# EAGLE board v3b (EAGLE 6.5.0)
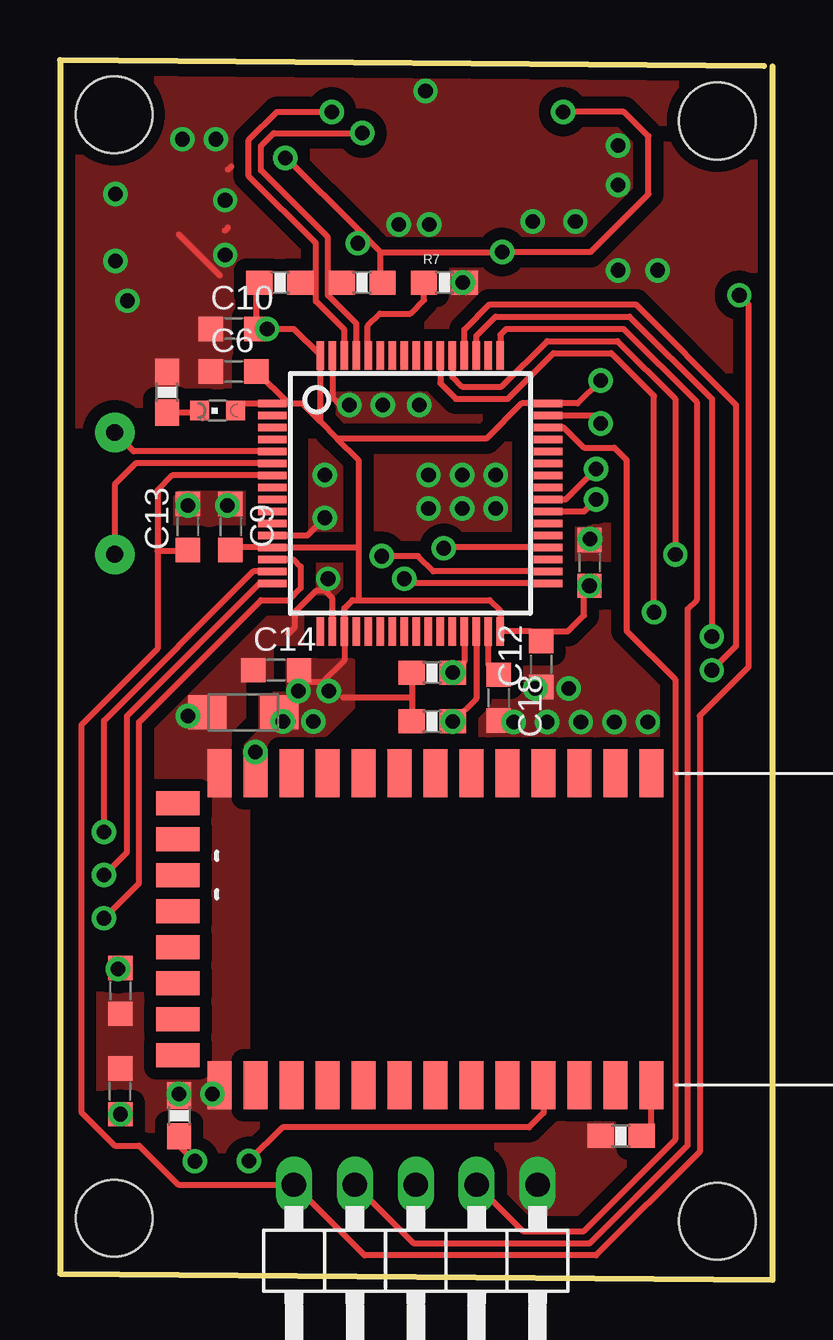
[diagram p0: board, top side]
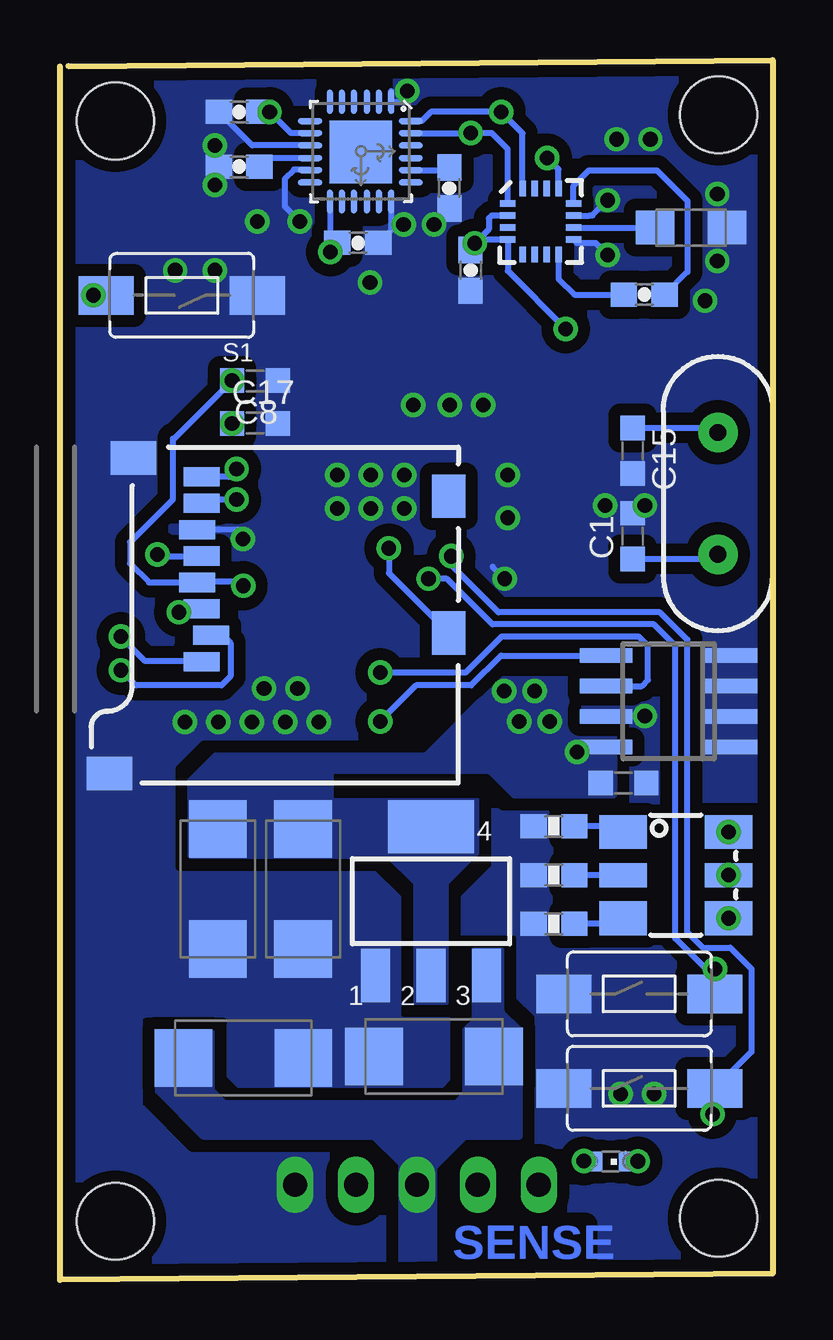
[diagram p1: board, bottom side, seen from below]

Size 29.72 x 50.83 mm. Coordinates in mm from the lower left corner, seen from the top.
Outline: 29.36,50.57 0,50.83 0,0.25 29.72,0 29.72,50.55
Copper layers (1*16): Top 0.035mm / dielectric 1.5mm / Bottom 0.035mm
Design rules "default *": minimum track width 10mil, minimum drill 24mil, track to track 8mil, track to pad 8mil, pad to pad 8mil, via to via 10mil, smd to smd 8mil, copper to edge 20mil, drill to drill 10mil, minimum pad ring 10mil, minimum via ring 8mil, stop-mask expansion 0mil, vias tented up to drill 100mil, thermal gap 10mil
Net classes: 1 power: width 0.15 mm, drill 0.2 mm, clearance 0.152 mm
Holes 3.2 mm at 27.41,48.29 2.26,48.54 27.41,2.44 2.26,2.57
tKeepout: area -11.1,-0.5 to -4.1,6.5

## Footprints (pad centres in the part's own frame; a part is rotated, then mirrored left to right if it is on the bottom)
C-0603 = smd 1.016 x 1.016: 1 -0.953,0; 2 0.953,0
SMC_C = smd 2.4 x 2.4: + -2.5,0; - 2.5,0
SMC_A = smd 1.6 x 1.4: + -1.5,0; - 1.5,0
SPARKFUN_0603-CAP = smd 1.1 x 1: 1 -0.85,0; 2 0.85,0
SO-08 = smd 0.6 x 2.2: 1 -1.905,-2.6; 2 -0.635,-2.6; 3 0.635,-2.6; 4 1.905,-2.6; 5 1.905,2.6; 6 0.635,2.6; 7 -0.635,2.6; 8 -1.905,2.6
LINEAR_SOT223 = smd 1.219 x 2.235: 1 -2.311,-3.099; 2 0,-3.099; 3 2.311,-3.099 | smd 3.6 x 2.2: 4 0,3.099
TESTING_QFN-24-4MM2 = smd 1.016 x 0.254: 1 -2.066,1.257; 2 -2.066,0.75; 3 -2.066,0.247; 4 -2.066,-0.287; 5 -2.066,-0.792; 6 -2.066,-1.297; 13 2.086,-1.297; 14 2.086,-0.792; 15 2.086,-0.287; 16 2.086,0.247; 17 2.086,0.75; 18 2.086,1.257 | smd 0.254 x 1.016: 7 -1.267,-2.122; 8 -0.762,-2.122; 9 -0.258,-2.122; 10 0.278,-2.122; 11 0.78,-2.122; 12 1.287,-2.122; 19 1.287,2.082; 20 0.78,2.082; 21 0.278,2.082; 22 -0.258,2.082; 23 -0.762,2.082; 24 -1.267,2.082 | smd 2.616 x 2.616: P$1 0.02,-0.01
SPARKFUN_16LPCC = smd 0.65 x 0.28: 1 -1.37,0.75; 2 -1.37,0.25; 3 -1.37,-0.25; 4 -1.37,-0.75; 9 1.37,-0.75; 10 1.37,-0.25; 11 1.37,0.25; 12 1.37,0.75 | smd 0.28 x 0.65: 5 -0.75,-1.37; 6 -0.25,-1.37; 7 0.25,-1.37; 8 0.75,-1.37; 13 0.75,1.37; 14 0.25,1.37; 15 -0.25,1.37; 16 -0.75,1.37
1X05/90 = drill 1.016 long: 1 -5.08,-3.81; 2 -2.54,-3.81; 3 0,-3.81; 4 2.54,-3.81; 5 5.08,-3.81
CHIPLED_0603 = smd 0.8 x 0.8: A 0,-0.75; C 0,0.75
SPARKFUN_0603-RES = smd 1.1 x 1: 1 -0.85,0; 2 0.85,0
TACTILE-SWITCH-1101NE = smd 2.3 x 1.6: P$1 -3.15,0; P$2 3.15,0
MICRO-SD-SOCKET-PP = smd 0.8 x 1.5: 1 -8.94,10.7; 2 -7.84,10.3; 3 -6.74,10.7; 4 -5.64,10.9; 5 -4.54,10.7; 6 -3.44,10.9; 7 -2.34,10.7; 8 -1.24,10.7 | smd 1.8 x 1.4: CD1 -2.05,0.4; CD2 -7.75,0.4 | smd 1.4 x 1.9: GND1 -13.6,14.55; GND3 -0.45,13.55
BLUETOOTH_SMD = smd 2 x 1: 1 0,0; 2 0,-1.5; 3 0,-3; 4 0,-4.5; 5 0,-6; 6 0,-7.5; 7 0,-9; 8 0,-10.5; 9 0,-12; 10 0,-13.5; 11 0,-15; 12 0,-16.5; 13 0,-18; 22 13,-18; 23 13,-16.5; 24 13,-15; 25 13,-13.5; 26 13,-12; 27 13,-10.5; 28 13,-9; 29 13,-7.5; 30 13,-6; 31 13,-4.5; 32 13,-3; 33 13,-1.5; 34 13,0 | smd 1 x 1.8: 14 1.25,-19.75; 15 2.75,-19.75; 16 4.25,-19.75; 17 5.75,-19.75; 18 7.25,-19.75; 19 8.75,-19.75; 20 10.25,-19.75; 21 11.75,-19.75
LQFP64 = smd 0.3 x 1.2: 1 -3.75,-5.75; 2 -3.25,-5.75; 3 -2.75,-5.75; 4 -2.25,-5.75; 5 -1.75,-5.75; 6 -1.25,-5.75; 7 -0.75,-5.75; 8 -0.25,-5.75; 9 0.25,-5.75; 10 0.75,-5.75; 11 1.25,-5.75; 12 1.75,-5.75; 13 2.25,-5.75; 14 2.75,-5.75; 15 3.25,-5.75; 16 3.75,-5.75; 33 3.75,5.75; 34 3.25,5.75; 35 2.75,5.75; 36 2.25,5.75; 37 1.75,5.75; 38 1.25,5.75; 39 0.75,5.75; 40 0.25,5.75; 41 -0.25,5.75; 42 -0.75,5.75; 43 -1.25,5.75; 44 -1.75,5.75; 45 -2.25,5.75; 46 -2.75,5.75; 47 -3.25,5.75; 48 -3.75,5.75 | smd 1.2 x 0.3: 17 5.75,-3.75; 18 5.75,-3.25; 19 5.75,-2.75; 20 5.75,-2.25; 21 5.75,-1.75; 22 5.75,-1.25; 23 5.75,-0.75; 24 5.75,-0.25; 25 5.75,0.25; 26 5.75,0.75; 27 5.75,1.25; 28 5.75,1.75; 29 5.75,2.25; 30 5.75,2.75; 31 5.75,3.25; 32 5.75,3.75; 49 -5.75,3.75; 50 -5.75,3.25; 51 -5.75,2.75; 52 -5.75,2.25; 53 -5.75,1.75; 54 -5.75,1.25; 55 -5.75,0.75; 56 -5.75,0.25; 57 -5.75,-0.25; 58 -5.75,-0.75; 59 -5.75,-1.25; 60 -5.75,-1.75; 61 -5.75,-2.25; 62 -5.75,-2.75; 63 -5.75,-3.25; 64 -5.75,-3.75
SMD = smd 1.99 x 1.4: B+ -2.2,-1.8; B- 2.2,-1.8; R+ -2.2,1.8; R- 2.2,1.8 | smd 1.99 x 1: G+ -2.2,0; G- 2.2,0
HC49US = drill 0.7 pad 1.651: 1 -2.54,0; 2 2.54,0

## Placement (x,y rotation side)
C1  [C-0603]  5.84,30.99 90 bottom
C2  [C-0603]  22.07,29.87 270 top
C3  6v 10u  [SMC_C]  19.58,16.28 270 bottom
C4  6v 10u  [SMC_A]  7.65,23.65 180 top
C5  16v47u  [SMC_C]  14.12,9.3 180 bottom
C6  [C-0603]  7.24,37.85 0 top
C7  [C-0603]  2.51,7.85 90 top
C8  [C-0603]  21.59,37.47 180 bottom
C9  [C-0603]  7.11,31.37 270 top
C10  [C-0603]  7.24,39.62 0 top
C11  [C-0603]  6.22,20.7 180 bottom
C12  [C-0603]  20.07,25.65 90 top
C13  [C-0603]  5.33,31.37 90 top
C14  [C-0603]  9.02,25.4 0 top
C15  [C-0603]  5.84,34.54 270 bottom
C16  16v47u  [SMC_C]  22.07,9.25 0 bottom
C17  [C-0603]  21.59,35.69 0 bottom
C18  [C-0603]  18.29,24.26 270 top
C23  6v 10u  [SMC_C]  23.14,16.28 270 bottom
C25  [C-0603]  2.51,12.04 270 top
C26  100n  [SPARKFUN_0603-CAP]  22.25,46.38 180 bottom
C27  100n  [SPARKFUN_0603-CAP]  5.36,41.05 0 bottom
C28  4.7u  [SMC_A]  3.4,43.84 0 bottom
C29  100n  [SPARKFUN_0603-CAP]  12.6,42.06 270 bottom
C36  2.2n  [SPARKFUN_0603-CAP]  13.49,45.49 270 bottom
C38  100n  [SPARKFUN_0603-CAP]  17.3,43.21 0 bottom
C39  100n  [SPARKFUN_0603-CAP]  22.25,48.67 180 bottom
IC2  24LC256SN  [SO-08]  4.34,24.1 90 bottom
IC3  LINEAR_MC33269ST-3.3T3  [LINEAR_SOT223]  14.25,15.77 0 bottom
IC4  MPU-6050  [TESTING_QFN-24-4MM2]  17.17,47.02 270 bottom
IC5  HMC5883L  [SPARKFUN_16LPCC]  9.68,44.09 0 bottom
JP4  [1X05/90]  14.83,0.15 180 top
LD1  [CHIPLED_0603]  6.76,4.93 270 bottom
LD2  [CHIPLED_0603]  6.58,36.22 90 top
R1  10K  [SPARKFUN_0603-RES]  4.47,36.98 90 top
R2  10K  [SPARKFUN_0603-RES]  9.12,14.83 180 bottom
R3  10K  [SPARKFUN_0603-RES]  9.12,16.87 180 bottom
R5  10K  [SPARKFUN_0603-RES]  23.39,5.99 180 top
R6  10K  [SPARKFUN_0603-RES]  9.12,18.9 180 bottom
R7  10k  [SPARKFUN_0603-RES]  16.03,41.55 0 top
R9  10K  [SPARKFUN_0603-RES]  4.98,6.83 90 top
R10  [SPARKFUN_0603-RES]  12.6,41.55 0 top
R11  [SPARKFUN_0603-RES]  9.17,41.55 180 top
R15  4K7  [SPARKFUN_0603-RES]  15.52,25.3 0 top
R16  4K7  [SPARKFUN_0603-RES]  15.52,23.27 180 top
S1  RESET  [TACTILE-SWITCH-1101NE]  24.64,41.02 180 bottom
S2  RESET  [TACTILE-SWITCH-1101NE]  5.56,11.91 0 bottom
S4  RESET  [TACTILE-SWITCH-1101NE]  5.56,7.98 0 bottom
SDCARD2  microSD Socket  [MICRO-SD-SOCKET-PP]  13.11,34.7 90 bottom
U1  HC_05  [BLUETOOTH_SMD]  24.66,21.11 270 top
U2  STM32F405RGT  [LQFP64]  14.6,32.77 270 top
U$12  RGB_LED  [SMD]  4.04,16.87 0 bottom
Y2  [HC49US]  2.29,32.77 90 bottom

## Library data of the parts
C1 C2 C6-C15 C17 C18 C25 = cap-pan40
C3-C5 C16 C23 C28 = rcl
C26 C27 C29 C36 C38 C39 R10 R11 = Helios_RLC
IC2 = microchip; DIGIKEY: 24LC256-E/SN-ND; MF: MICROCHIP; MPN: 24LC256-I/SN; OC_FARNELL: 9757996; OC_NEWARK: 27C9144
IC3 = Robotech_Other
IC4 IC5 = Helios_IMU
JP4 = pinhead-1
LD1 LD2 = led
R1-R3 R5-R7 R9 R15 R16 = Robotech_RCL
S1 S2 S4 = pixhawk2; PARTNO: EVQ-P7J01P
SDCARD2 = SparkFun
U1 = SerialPortBluetooth
U2 = m4quad
U$12 = RGB_LED
Y2 = SparkFun-FreqCtrl

## Nets
3.3V: C2.2 C3.+ C4.+ C6.2 C8.2 C9.2 C10.2 C11.2 C12.2 C14.2 C23.+ C29.1 C38.1 C39.1 IC2.8 IC3.2 IC3.4 IC4.8 IC4.13 IC5.2 IC5.4 IC5.13 LD2.A R10.2 R11.2 R15.1 R16.2 SDCARD2.4 U1.12 U2.1 U2.13 U2.19 U2.32 U2.48 U2.64
+5V: C5.+ C16.+ IC3.3 JP4.3
BOOT0: R7.1 U2.60
BOOT1: U2.28
BT_KEY: R5.1 U1.34
BUTTONA: C25.1 S2.P$2 U2.33
BUTTONB: C7.1 S4.P$2 U2.34
GND: C1.2 C2.1 C3.- C4.- C5.- C6.1 C7.2 C8.1 C9.1 C10.1 C11.1 C12.1 C13.2 C14.1 C15.2 C16.- C17.2 C18.2 C23.- C25.2 C26.2 C28.- C29.2 C36.2 C38.2 C39.2 IC2.1 IC2.2 IC2.3 IC2.4 IC2.7 IC3.1 IC4.1 IC4.9 IC4.11 IC4.18 IC5.9 IC5.11 JP4.1 R1.2 R2.2 R3.2 R5.2 R6.2 R7.2 R9.2 S1.P$1 S2.P$1 S4.P$1 SDCARD2.6 SDCARD2.GND1 SDCARD2.GND3 U1.13 U1.22 U2.12 U2.18 U2.63
I2C1_SCL: IC4.23 IC5.1 R10.1 U2.61
I2C1_SDA: IC4.24 IC5.16 R11.1 U2.62
I2C2_SCL: IC2.6 R15.2 U2.29
I2C2_SDA: IC2.5 R16.1 U2.30
MISO: U2.22
MOSI: U2.23
N$2: R2.1 U$12.B+
N$3: C26.1 IC4.10
N$4: LD1.A U1.31
N$5: LD1.C R9.1
N$6: R6.1 U$12.R+
N$7: R3.1 U$12.G+
N$8: C36.1 IC4.20
N$10: C27.1 IC5.8
N$11: LD2.C R1.1
N$12: C28.+ IC5.10
N$13: C27.2 IC5.12
N$14: C15.1 U2.5 Y2.2
N$15: C1.1 U2.6 Y2.1
N$18: C18.1 U2.31
N$19: C17.1 U2.47
NSS: U2.20
RGB_CH1: U2.14 U$12.B-
RGB_CH2: U2.15 U$12.R-
RGB_CH3: U2.16 U$12.G-
SCK: U2.21
SDIO_CLK: SDCARD2.5 U2.53
SDIO_CMD: SDCARD2.3 U2.54
SDIO_D0: SDCARD2.7 U2.39
SDIO_D1: SDCARD2.8 U2.40
SDIO_D2: SDCARD2.1 U2.51
SDIO_D3: SDCARD2.2 U2.52
SDIO_DETECT: SDCARD2.CD2 U2.36
SW-!RESET: C13.1 JP4.5 S1.P$2 U2.7
SW_CLK: JP4.4 U2.49
SW_DIO: JP4.2 U2.46
UART_RXD: U2.42
USART1_RX: U2.59
USART1_TX: U2.58
USART3_RX: U1.1
USART3_TX: U1.2

## Tracks (layer width: path | path; a pad name or v marks a point on that pad's centre or on a via)
3.3V  (via drill 0.61)
  Top 0.254: v20.98,48.67 23.52,48.67 24.54,47.65 24.54,45.24 22.12,42.82 v18.44,42.82 13.36,42.82 | 13.36,42.82 13.36,41.64 R10.2 13.49,41.59 | v12.42,43.19 12.42,43.77 | 13.36,42.82 12.42,43.77 | C12.2 19.66,27.02 | 19.66,27.02 U2.32 18.35,27.87 17.91,28.32 12.45,28.32 | 9.65,24.89 10.92,24.89 11.85,25.83 U2.19 11.85,27.98 12.19,28.32 12.45,28.32 | R15.1 14.67,24.26 | 14.67,24.26 R16.2 | 14.67,24.26 11.81,24.26 | 19.66,27.02 21.17,27.02 21.84,27.69 21.84,28.69 | 21.84,28.69 21.84,28.82 | 9.52,36.52 U2.1 7.62,36.52 LD2.A | 11.56,35.05 12.45,34.16 12.45,30.61 | 11.56,35.05 10.85,35.75 | 10.85,35.75 U2.64 9.75,39.62 v8.64,39.62 C10.2 8.19,41.43 R11.2 | 10.85,35.75 10.09,36.52 9.52,36.52 | C6.2 9.52,36.52 | C8.2 21.59,36.52 U2.48 19.24,36.52 17.78,35.05 11.56,35.05 | 12.45,30.61 12.45,28.32 | 12.45,30.61 12.35,30.52 U2.13 7.21,30.52 C9.2 | v9.4,46.74 9.45,46.74 12.42,43.77 | U1.12 v8.15,22 | C2.2 21.84,28.69
  Bottom 0.254: C39.1 v20.98,48.67 20.09,47.78 IC4.8 | 24.03,29.08 24.03,29.11 24.01,29.11 | 12.22,43.34 IC5.4 11.05,42.03 v8.64,39.62 | 12.22,43.34 12.26,43.34 v12.42,43.19 11.84,43.77 11.84,44.22 11.71,44.34 IC5.2 | IC4.13 18.47,43.52 C38.1 17.93,43.42 17.93,43.46 18.44,42.95 v18.44,42.82 | C29.1 12.22,43.29 12.22,43.34 | 24.01,29.11 SDCARD2.4 26.01,29.06 26.8,29.84 26.8,30.73 25.02,32.51 25.02,34.99 | 20.09,18.78 C3.+ | 25.02,35.06 25.02,34.99 | C8.2 25.02,34.99 | IC5.13 8.93,46.27 v9.4,46.74 | 24.01,29.11 22.26,29.11 C2.2
  other vias: 22.54,37.47 9.3,23.27 9.93,24.54 11.2,24.54 10.57,23.27 22.07,28.92
  pour Bottom (isolate 0.508, no thermals): 24.28,17.68 16.03,17.68 14.88,16.54 14.88,11.58 13.61,11.58 13.61,16.54 12.34,17.81 12.34,19.96 18.41,19.94 18.41,21.21 11.81,21.21 10.79,20.19 6.6,20.19 6.6,25.02 11.3,25.02 14.48,21.84 23.24,21.84 24.28,20.8
  pour Top (isolate 0.508, no thermals): 9.14,22.73 11.05,22.73 12.19,23.88 12.19,25.78 9.53,25.78 9.53,24.38 8.38,24.38 8.38,22.86 7.77,22.25 7.77,22.12 8.53,22.12
+5V
  pour Bottom (no thermals): 25.65,10.29 25.65,7.87 23.75,5.97 16.64,5.97 15.49,4.83 15.49,0.38 14.1,0.38 14.1,4.7 12.83,5.97 10.54,5.97 10.54,10.41 11.3,11.18 11.3,13.72 12.45,13.72 12.45,10.8 12.83,10.41 12.83,7.75 13.21,7.37 22.86,7.37 23.37,7.87 23.37,10.29
BOOT0
  Top 0.254: 15.14,41.52 R7.1 15.18,40.83 14.6,40.26 13.33,40.26 12.83,39.75 12.83,38.48 U2.60
BT_KEY
  Top 0.254: R5.1 24.66,6.41 U1.34
BUTTONA  (via drill 0.61)
  Top 0.254: U2.33 14.54,29.02 v14.35,29.21 | C25.1 2.48,12.95 v2.41,12.95
  Bottom 0.254: v14.35,29.21 13.59,29.21 11.68,27.31 4.95,27.31 4.06,26.42 4.06,14.22 2.79,12.95 v2.41,12.95 S2.P$2 | S2.P$2
BUTTONB  (via drill 0.61)
  Top 0.254: U2.34 15.57,29.52 14.93,30.15 v13.41,30.15 | C7.1 2.48,6.86 2.29,6.86
  Bottom 0.254: 2.44,8 S4.P$2 | S4.P$2 0.89,9.5 0.89,12.95 1.78,13.84 2.92,13.84 3.56,14.48 3.56,26.67 4.7,27.81 11.43,27.81 13.41,29.79 v13.41,30.15 | C7.1 2.51,7.87 S4.P$2
  other vias: 2.51,6.9
GND  (via drill 0.61)
  Top 0.254: 7.01,43.84 6.88,43.71 | 7.01,46.25 7.14,46.38 | U2.63 11.35,36.78 11.68,36.45 v12.06,36.45 | 22.1,31.1 v22.1,30.86 | U2.18 11.35,28.4 11.05,28.7 | 11.05,28.7 10.67,28.7 9.78,27.81 9.78,27.18 9.53,26.92 | 11.05,29.11 11.05,28.7 | 6.66,41.85 4.95,43.56 | U2.12 10.31,31.02 v11.05,31.75
  Bottom 0.254: 23.01,48.58 C39.2 21.71,47.27 IC4.9 | IC5.11 7.65,44.34 7.64,44.35 7.52,44.35 v6.88,44.98 | 15.91,49.54 IC4.1 15.49,49.08 15.49,49.3 15.23,49.55 15.14,49.55 | IC5.9 8.17,43.2 7.39,43.2 v6.88,42.7 | IC4.11 19.31,46.24 19.33,46.25 19.96,46.25 20.34,45.87 20.34,44.73 v19.71,44.09 | IC4.18 15.91,43.74 C38.2 | v11.18,29.21 11.68,29.72 | 22.11,31.26 SDCARD2.6 | IC2.7 6.92,23.5 v5.33,23.5
  other vias: 23.27,47.27 23.27,45.62 16.79,41.55 21.49,44.09 14.12,43.97 15.39,43.97 6.99,32.26 2.31,42.44 5.33,32.26 13.46,36.45 14.99,36.45 24.51,23.24 23.11,23.24 21.72,23.24 20.32,23.24 18.92,23.24 21.21,24.64 19.81,24.64 18.16,32.13 16.76,32.13 15.37,32.13 18.16,33.53 16.76,33.53 15.37,33.53 11.05,33.53 2.31,45.24 2.82,40.79 5.11,47.52 6.5,47.52 6.35,7.75 4.95,7.75 23.27,42.06 24.92,42.06 15.24,49.53
  pour Top (isolate 0.508, rank 6, no thermals): -2.64,51.71 -2.64,0.25 -2.39,0 35.69,0 35.94,0.25 35.94,9.27 8,9.27 7.75,9.53 7.75,19.69 8,19.94 35.69,19.94 35.94,20.19 35.94,52.07 -2.41,52.07 -2.67,51.82 -2.67,51.56
  pour Bottom (isolate 0.508, rank 6, no thermals): -5.69,50.7 29.62,50.7 29.62,-4.83 29.36,-5.08 -5.71,-5.08
I2C1_SCL  (via drill 0.61)
  Top 0.254: U2.61 12.35,39.84 11.18,41.02 11.18,41.53 | 11.18,41.53 11.18,43.43 8.38,46.23 8.38,47.24 8.92,47.78 v12.6,47.78 | R10.1 11.72,41.53 11.18,41.53
  Bottom 0.254: IC4.23 v12.6,47.78 11.71,47.78 11.05,47.12 IC5.1
I2C1_SDA  (via drill 0.61)
  Top 0.254: U2.62 11.85,39.58 10.67,40.77 10.67,41.53 | 10.03,41.54 R11.1 10.04,41.53 10.67,41.53 | 10.67,41.53 10.67,43.18 7.87,45.97 7.87,47.5 9.04,48.67 v11.33,48.67
  Bottom 0.254: v11.33,48.67 11.32,48.67 | IC4.24 14.63,48.28 14.25,48.67 v11.33,48.67 | IC5.16 10.43,47.77 v11.33,48.67
I2C2_SCL  (via drill 0.61)
  Top 0.254: U2.29 16.85,25.75 16.41,25.3 R15.2
  Bottom 0.254: R15.2 12.8,25.3 11.3,26.8 5.59,26.8 5.21,26.42 5.21,24.99 5.46,24.74 IC2.6
  other vias: 16.37,25.3
I2C2_SDA  (via drill 0.61)
  Top 0.254: U2.30 17.35,24.21 16.41,23.27 R16.1
  Bottom 0.254: IC2.5 11.33,26.01 12.57,24.77 14.87,24.77 R16.1
  other vias: 16.37,23.27
N$2
  Bottom 0.254: U$12.B+ 6.47,14.83 R2.1
N$3
  Bottom 0.254: IC4.10 21.04,46.74 C26.1
N$4  (via drill 0.61)
  Top 0.254: U1.31 20.16,6.95 19.56,6.35 9.27,6.35 v7.87,4.95
  Bottom 0.254: LD1.A 7.53,4.95 v7.87,4.95
N$5  (via drill 0.61)
  Top 0.254: v5.62,4.94 4.98,5.59 R9.1
  Bottom 0.254: LD1.C 5.99,4.94 v5.62,4.94
N$6
  Bottom 0.254: U$12.R+ 6.47,18.9 R6.1
N$7
  Bottom 0.254: U$12.G+ R3.1
N$8
  Bottom 0.254: IC4.20 13.59,46.24 C36.1
N$10
  Bottom 0.254: C27.1 8.28,41.05 8.93,41.69 IC5.8
N$11
  Top 0.254: LD2.C 5.74,36.13 R1.1
N$12
  Bottom 0.254: IC5.10 C28.+
N$13
  Bottom 0.254: IC5.12 8.31,45.59 7.67,46.23 4.83,46.23 3.56,44.96 3.56,42 C27.2
N$14
  Top 0.254: U2.5 3.08,34.52 Y2.2
  Bottom 0.254: C15.1 2.48,35.5 Y2.2
N$15
  Top 0.254: U2.6 3.15,34.02 2.29,33.15 Y2.1
  Bottom 0.254: C1.1 2.48,30.03 Y2.1
N$18
  Top 0.254: C18.1 17.85,25.64 U2.31
N$19  (via drill 0.61)
  Top 0.254: U2.47 22.21,36.02 C17.1
  other vias: 22.54,35.69
RGB_CH1  (via drill 0.61)
  Top 0.254: U2.14 9.74,30.02 10.03,29.72 10.03,28.83 9.53,28.32 8.38,28.32 3.3,23.24 3.3,16.53 U$12.B-
  Bottom 0.254: U$12.B- 1.44,15.07 1.4,15.11 1.79,15.11 U$12.B-
  other vias: 1.84,15.07
RGB_CH2  (via drill 0.61)
  Top 0.254: U2.15 8.05,29.52 1.84,23.3 U$12.R-
  Bottom 0.254: U$12.R- 1.27,18.67 U$12.R-
  other vias: 1.84,18.67
RGB_CH3  (via drill 0.61)
  Top 0.254: U2.16 8.31,29.02 2.79,23.5 2.79,17.82 U$12.G-
  Bottom 0.254: U$12.G- 2.26,16.87 2.29,16.89 1.86,16.89 U$12.G-
  other vias: 1.84,16.87
SDIO_CLK  (via drill 0.61)
  Top 0.254: U2.53 16.35,37.62 16.76,37.21 18.41,37.21 20.32,39.12 23.24,39.12 25.65,36.7 v25.65,30.23
  Bottom 0.254: v25.65,30.23 25.58,30.16 SDCARD2.5
SDIO_CMD  (via drill 0.61)
  Top 0.254: U2.54 15.85,37.36 16.51,36.7 18.67,36.7 20.57,38.61 22.99,38.61 24.77,36.83 v24.77,27.81
  Bottom 0.254: 23.94,27.97 23.93,27.96 | 23.93,28.21 23.93,27.96 | 23.79,27.94 SDCARD2.3 | SDCARD2.3 23.95,27.81 v24.77,27.81 | SDCARD2.3 23.93,27.96
SDIO_D0  (via drill 0.61)
  Top 0.254: v22.35,32.51 21.86,32.02 U2.39
  Bottom 0.254: v22.35,32.51 23.65,32.51 SDCARD2.7
SDIO_D1  (via drill 0.61)
  Top 0.254: U2.40 21.09,32.52 v22.35,33.78
  Bottom 0.254: v22.35,33.78 22.68,33.46 SDCARD2.8
SDIO_D2  (via drill 0.61)
  Top 0.254: U2.51 17.35,39.33 18.16,40.13 23.75,40.13 27.18,36.7 v27.18,26.8
  Bottom 0.254: SDCARD2.1 23.83,25.78 26.16,25.78 v27.18,26.8
SDIO_D3  (via drill 0.61)
  Top 0.254: U2.52 16.85,39.59 17.91,40.64 24,40.64 28.19,36.45 28.19,26.42 v27.18,25.4
  Bottom 0.254: SDCARD2.2 22.92,26.86 22.61,26.54 22.61,25.15 22.99,24.77 26.54,24.77 v27.18,25.4
SDIO_DETECT  (via drill 0.61)
  Top 0.254: U2.36 16.04,30.52 v16,30.48
  Bottom 0.254: 13.46,26.99 SDCARD2.CD2 16,29.44 v16,30.48
SW-!RESET  (via drill 0.61)
  Top 0.254: U2.7 4.69,33.52 4.06,32.89 4.06,30.35 | C13.1 5.27,30.35 4.06,30.35 | 4.06,30.35 4.06,26.29 0.89,23.11 0.89,6.98 2.29,5.59 3.3,5.59 4.93,3.96 JP4.5 12.7,1.02 22.35,1.02 26.67,5.33 26.67,23.5 28.7,25.53 28.7,40.64 v28.32,41.02
  Bottom 0.254: S1.P$2 v28.32,41.02
SW_CLK
  Top 0.254: JP4.4 14.73,1.52 22.1,1.52 26.16,5.59 26.16,27.94 26.54,28.32 26.54,36.58 23.49,39.62 18.61,39.62 18.35,39.37 U2.49
SW_DIO
  Top 0.254: U2.46 21,35.52 21.84,34.67 23.11,34.67 23.62,34.16 23.62,27.05 25.65,25.02 25.65,5.84 21.84,2.03 19.3,2.03 JP4.2

## Text on the board
Bottom: SENSE
bNames: vnd241092@gmail.com